# Altium PCB BATTERIE.PcbDoc
Units mm, origin at the board's own origin, x right, y up, seen from the top; angles counter-clockwise.
Board outline 68.58 x 28.65 mm, 2 copper layers (Top Layer, Bottom Layer); 31 components, 17 nets, 97 pads, 15 vias.
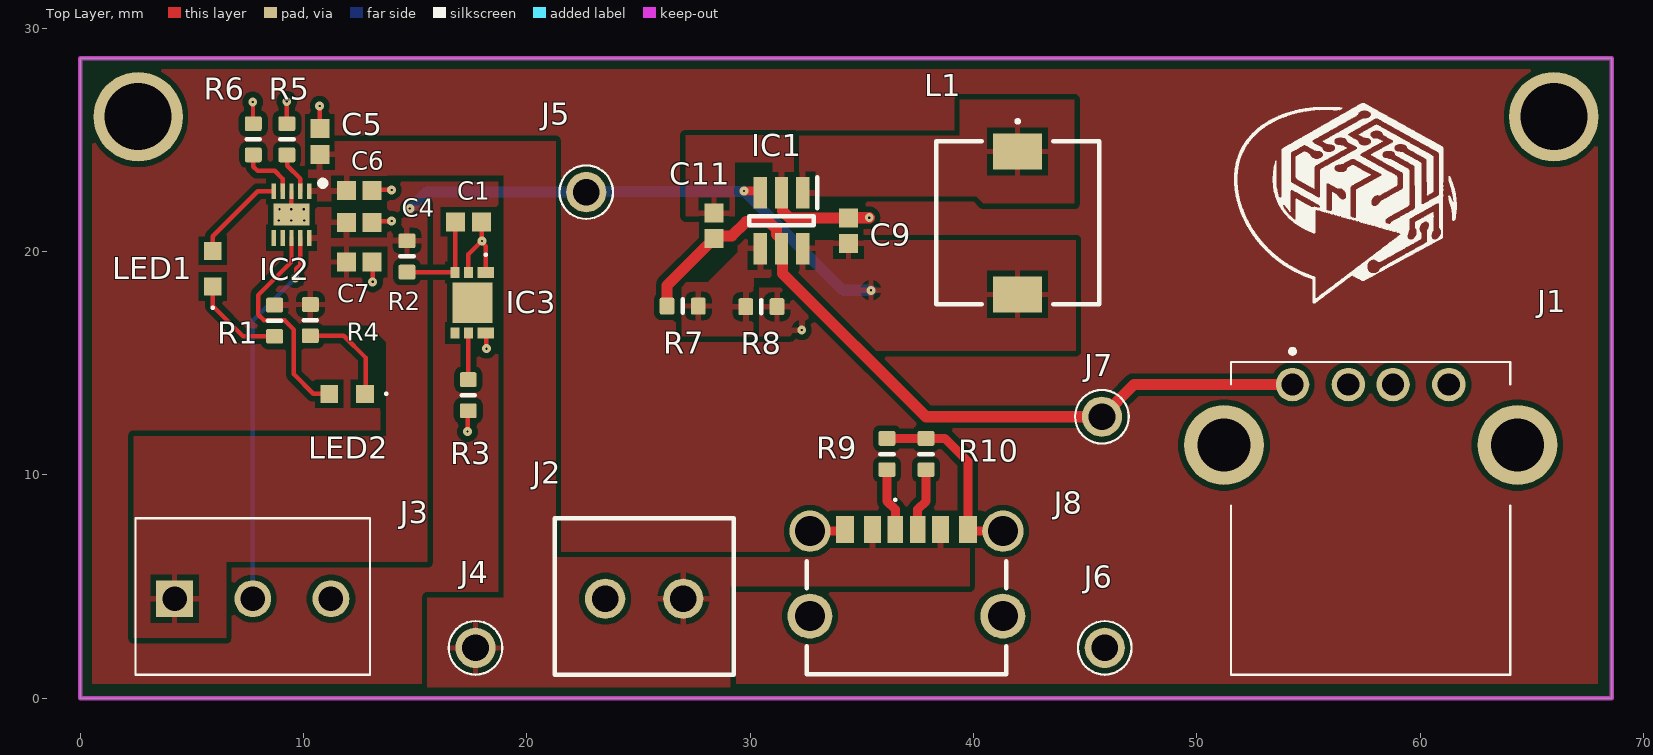
[diagram p0: Top Layer view]
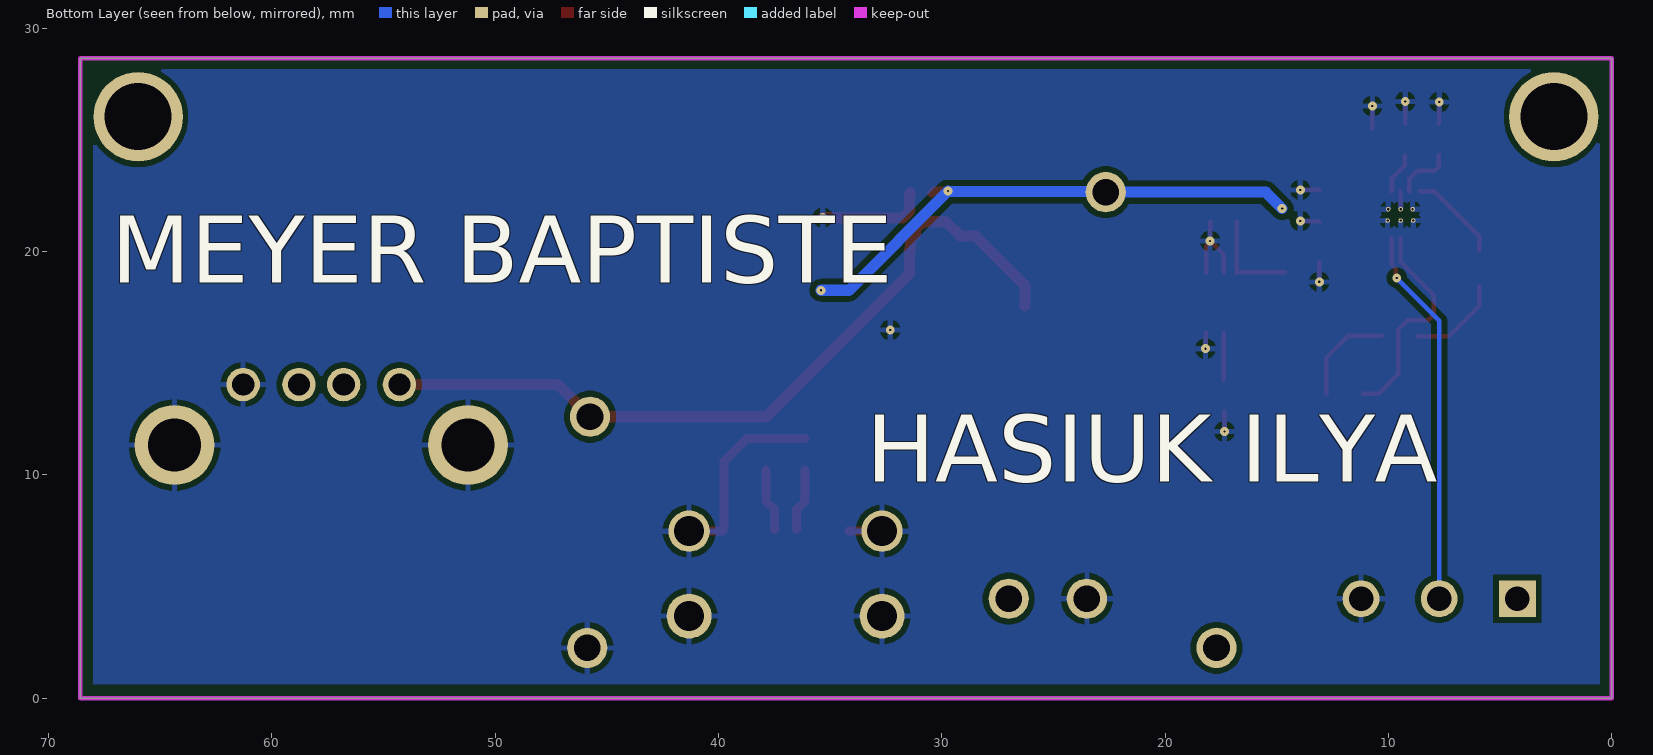
[diagram p1: Bottom Layer view, seen from below]
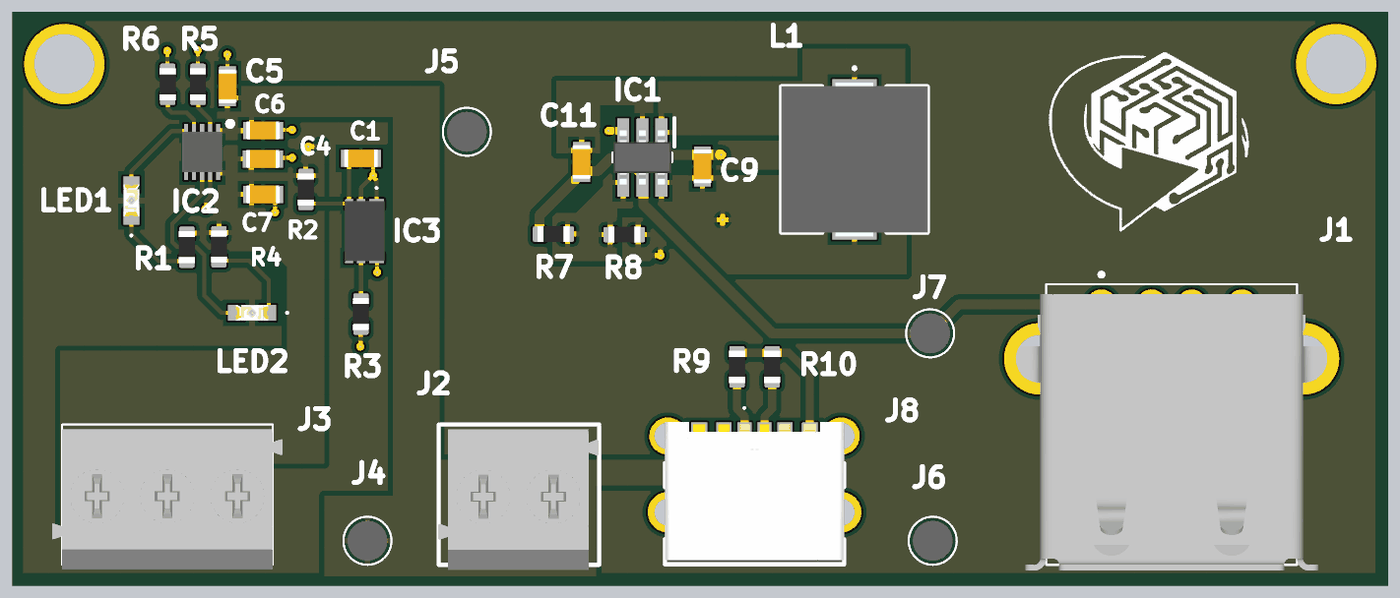
[diagram p2: 3D render of the assembled board from above, using the file's embedded part models]

## Layer stack, top to bottom
Top Solder: solder mask 0.0102, Solder Resist, Dk 3.5
Top Layer: signal copper 0.0356
Dielectric 1: dielectric 0.32, FR-4, Dk 4.8
Bottom Layer: signal copper 0.0356
Bottom Solder: solder mask 0.0102, Solder Resist, Dk 3.5

## Board outline
0,0 68.58,0 68.58,28.651 0,28.651

## Design rules (kind name [scope] priority, off if disabled: settings)
Clearance [All] p1: gap=0.254 ignorepadtopadclearanceinfootprint=TRUE except(0: Arc-Hole Track-Hole SMDPad-Hole THPad-Hole Via-Hole Fill-Hole Poly-Hole Region-Hole Text-Hole; 0.17: Arc-Arc Arc-Track Arc-SMDPad Track-Track Track-SMDPad)
PolygonConnect [All] p1: connectstyle=Relief reliefconductorwidth=0.254 reliefentries=4 polygonreliefangle="90 Angle" airgapwidth=0.254
RoutingVias [All] p1: holewidth=0.711 width=1.27 viastyle="Through Hole" minholewidth=0.711 minwidth=1.27 maxholewidth=0.711 maxwidth=1.27
SolderMaskExpansion [All] p1: expansion=0.102 istentingtop=FALSE
Width [All] p1: maxlimit=0.51 minlimit=0.2 preferedwidth=0.2
30 further rules are at their usual default settings.

## Components (designator, comment, footprint, x,y, rotation, side; value= is the part's Value field where it differs from the comment)
C1 "Capacitor 100 nF" CAPC1608X90X40LL10T20 17.383,21.33 r0 top value=100nF
C4 "Capacitor 10 uF" CAPC1608X90X40LL10T20 12.487,21.3 r0 top value=10µF
C5 "Capacitor 1 uF +/- 10% 25 V 0603" CAPC1608X90X40LL10T20 10.725,24.925 r90 top value=1µF
C6 "Capacitor 10 uF" CAPC1608X90X40LL10T20 12.497,22.722 r0 top value=10µF
C7 "Capacitor 1 uF +/- 10% 25 V 0603" CAPC1608X90X40LL10T20 12.497,19.533 r0 top value=1µF
C9 "Capacitor 10 uF" CAPC1608X90X40LL10T20 34.402,20.927 r90 top value=10µF
C11 "Capacitor 10 uF" CAPC1608X90X40LL10T20 28.377,21.152 r90 top value=10µF
IC1 "MCP1640DT-I_CHY" SOT95P270X145-6N 31.402,21.377 r270 top
IC2 "BQ24045DSQR" SON40P200X200X80-11N 9.458,21.655 r270 top
IC3 "AP9221SA-CC-HAC-7" AP9221SACCHAC7 17.558,17.705 r180 top
J1 "292303-9" 2923039 57.788,8.34 r0 top
J2 "1776275-2" 17762752 23.504,4.45 r0 top
J3 "1776275-3" 17762753 4.225,4.45 r0 top
J4 "050_LT_B2" 050LTB2 17.7,2.25 r0 top
J5 "050_LT_B2" 050LTB2 22.657,22.657 r0 top
J6 "050_LT_B2" 050LTB2 45.878,2.25 r0 top
J7 "050_LT_B2" 050LTB2 45.75,12.6 r0 top
J8 "10164359-00011LF" 1016435900011LF 36.996,4.525 r0 top
L1 "10µ" 74477710 41.977,21.277 r0 top
LED1 "150060BS75003" 150060BS75003 5.933,19.23 r90 top
LED2 "150060BS75003" 150060BS75003 11.95,13.625 r180 top
R1 "Resistor 1.5k" RESC0603(1608)_L 8.7,16.9 r90 top value=1.5k
R2 "Resistor 350R" RESC0603(1608)_L 14.629,19.78 r270 top value=350R
R3 "Resistor 2.7k" RESC0603(1608)_L 17.374,13.564 r270 top value=2.7K
R4 "Resistor 1.5k" RESC0603(1608)_L 10.3,16.925 r270 top value=1k
R5 "Resistor 120R +/-5 % 0603 0.1 W" RESC0603(1608)_L 9.25,25.025 r90 top value=1k
R6 "Resistor 2k" RESC0603(1608)_L 7.746,25.025 r90 top value=2k
R7 "Resistor 976R" RESC0603(1608)_L 26.977,17.552 r0 top value=976
R8 "Resistor 309R" RESC0603(1608)_L 30.502,17.527 r0 top value=309
R9 "Resistor 5.1k" RESC0603(1608)_L 36.125,10.929 r90 top value=5.1k
R10 "Resistor 5.1k" RESC0603(1608)_L 37.875,10.929 r90 top value=5.1k

## Footprints (in the part's own frame and the unit in brackets; to place one, negate y for a bottom-side part, rotate by r counter-clockwise, add the part's x,y. Pads: shape width x height; smd on the part's side, far side on the other; paste and mask are expansions set on the pad)
050LTB2 [mm]
  round 1.8 hole 1.2: 1(0,0)
  silkscreen extent -1.2,-1.2 1.2,1.2, body extent -1,-0.99 1,0.99, height 4.6
150060BS75003 [mm]
  rect 0.8x0.8 smd: 1(-0.8,0) 2(0.8,0)
  silkscreen extent -1.8,-0.05 -1.7,0.05, body extent -0.8,-0.4 0.8,0.4, height 0.7
2923039 [mm]
  round 1.5 hole 1: 1(-3.5,5.7) 2(-1,5.7) 3(1,5.7) 4(3.5,5.7)
  round 3.57 hole 2.38: 5(-6.57,2.99) 6(6.57,2.99)
  silkscreen extent -6.25,-7.29 6.25,7.29, body extent -8.63,-7.58 8.63,7.58, height 7.19
17762752 [mm]
  round 1.8 hole 1.2: 1(0,0) 2(3.5,0)
  silkscreen extent -2.25,-3.4 5.75,3.6, body extent -2.28,-3.65 5.72,3.35, height 8.37
17762753 [mm]
  rect 1.65x1.65 hole 1.1: 1(0,0)
  round 1.65 hole 1.1: 2(3.5,0) 3(7,0)
  silkscreen extent -1.75,-3.4 8.75,3.6, body extent -2.25,-3.63 9.25,3.37, height 8.26
74477710 [mm]
  rect 2.2x1.6 smd: 1(0,3.2) 2(0,-3.2)
  silkscreen extent -3.65,-3.65 3.65,4.6, body extent -3.65,-3.84 3.65,3.84, height 4.6
1016435900011LF [mm]
  rect 0.7x1.2 smd: A5(-0.5,3.03) B5(0.5,3.03)
  rect 0.76x1.2 smd: A9(1.52,3.03) B9(-1.52,3.03)
  rect 0.8x1.2 smd: A12(2.75,3.03) B12(-2.75,3.03)
  round 1.85 hole 1.34: MH1(-4.32,2.95) MH2(4.32,2.95)
  round 2.01 hole 1.34: MH3(-4.32,-0.85) MH4(4.32,-0.85)
  silkscreen extent -4.47,-3.45 4.47,4.4, body extent -4.47,-3.24 4.47,3.66, height 3.25
AP9221SACCHAC7 [mm]
  rect 0.75x0.5 smd: 1(-0.6,-1.35) 6(-0.6,1.35)
  rect 0.4x0.5 smd: 2(0.175,-1.35) 3(0.775,-1.35) 4(0.775,1.35) 5(0.175,1.35)
  rect 1.8x1.8 smd: 7(0,0)
  silkscreen extent -0.65,-2.2 -0.55,-2.1, body extent -1,-1.5 1,1.5, height 0.56
CAPC1608X90X40LL10T20 [mm] "Chip Capacitor, 2-Leads, Body 1.70x0.90mm, IPC High Density"
  rect 0.85x0.85 smd: 1(-0.575,0) 2(0.575,0)
  body extent -0.85,-0.45 0.85,0.45, height 0.9
RESC0603(1608)_L [mm] "Chip Resistor, Body 1.6x0.8mm, IPC High Density"
  rrect25% 0.66x0.76 smd: 1(-0.7,0) 2(0.7,0)
  silkscreen extent 0,-0.3 0,0.3, body extent -0.8,-0.4 0.8,0.4, height 0.45
SON40P200X200X80-11N [mm]
  rect 0.7x0.2 smd: 1(-1.05,0.8) 2(-1.05,0.4) 3(-1.05,0) 4(-1.05,-0.4) 5(-1.05,-0.8) 6(1.05,-0.8) 7(1.05,-0.4) 8(1.05,0) 10(1.05,0.8) pt(1.05,0.4)
  rect 1x1.6 smd: 11(0,0)
  silkscreen extent -1.52,1.28 -1.28,1.53, body extent -1,-1 1,1, height 0.8
SOT95P270X145-6N [mm]
  rect 1.4x0.6 smd: 1(-1.25,0.95) 2(-1.25,0) 3(-1.25,-0.95) 4(1.25,-0.95) 5(1.25,0) 6(1.25,0.95)
  silkscreen extent -1.95,-1.45 0.2,1.6, body extent -1.35,-1.45 1.35,1.45, height 1.45

## Part data
C1 C4 C7 C9 C11: library part CMP-001-00005-6, "Chip Capacitor, 1 uF, +/- 10%, 25 V, 0603 (1608 Metric)", Capacitor Type=Ceramic, Case/Package=0603, Max Operating Temperature=125°C, Min Operating Temperature=-55°C, Tolerance=10%, Voltage Rating=25V, Mounting Technology=SM, Pins=2, RoHS Compliant=True
C5: library part UMK107BJ105KA-T, "Chip Capacitor, 1 uF, +/- 10%, 25 V, 0603 (1608 Metric)", Capacitor Type=Ceramic, Case/Package=0603, Max Operating Temperature=125°C, Min Operating Temperature=-55°C, Tolerance=10%, Voltage Rating=25V, Mounting Technology=SM, Pins=2, RoHS Compliant=True
C6: library part CMP-001-00005-6, "Chip Capacitor, 10 uF,", Capacitor Type=Ceramic, Case/Package=0603, Max Operating Temperature=125°C, Min Operating Temperature=-55°C, Tolerance=10%, Voltage Rating=25V, Mounting Technology=SM, Pins=2, RoHS Compliant=True
IC1: "Integrated Circuit", Arrow Part Number=MCP1640DT-I/CHY, Manufacturer_Name=Microchip, Mouser Part Number=579-MCP1640DT-I/CHY, Arrow Price/Stock=https://www.arrow.com/en/products/mcp1640dt-ichy/microchip-technology?region=nac, Datasheet Link=https://componentsearchengine.com/Datasheets/2/MCP1640DT-I_CHY.pdf, Height=1.45mm, Manufacturer_Part_Number=MCP1640DT-I/CHY, Mouser Price/Stock=https://www.mouser.co.uk/ProductDetail/Microchip-Technology/MCP1640DT-I-CHY?qs=Z2DEGP6RHSmcahvjAPXzWA%3D%3D
IC2: "Integrated Circuit", Manufacturer_Name="Texas Instruments", Mouser Part Number=595-BQ24045DSQR, Arrow Part Number=BQ24045DSQR, Arrow Price/Stock=https://www.arrow.com/en/products/bq24045dsqr/texas-instruments?region=nac, Datasheet Link=http://www.ti.com/lit/gpn/bq24045, Height=0.8mm, Manufacturer_Part_Number=BQ24045DSQR, Mouser Price/Stock=https://www.mouser.co.uk/ProductDetail/Texas-Instruments/BQ24045DSQR?qs=KkE6aTVgMAQPXkV4rQ%2F6tA%3D%3D
IC3: "Integrated Circuit", Manufacturer_Name="Diodes Inc.", Mouser Part Number=621-AP9221SA-CCHAC-7, Arrow Part Number=AP9221SA-CC-HAC-7, Arrow Price/Stock=https://www.arrow.com/en/products/ap9221sa-cc-hac-7/diodes-incorporated?region=nac, Datasheet Link=https://www.diodes.com/assets/Datasheets/AP9221.pdf, Height=0.65mm, Manufacturer_Part_Number=AP9221SA-CC-HAC-7, Mouser Price/Stock=https://www.mouser.co.uk/ProductDetail/Diodes-Incorporated/AP9221SA-CC-HAC-7?qs=xZ%2FP%252Ba9zWqYP2BSSx9w0XQ%3D%3D
J1: "Connector", Manufacturer_Name="TE Connectivity", Mouser Part Number=571-292303-9, Arrow Part Number=292303-9, Arrow Price/Stock=https://www.arrow.com/en/products/292303-9/te-connectivity?region=nac, Datasheet Link=http://www.te.com/commerce/DocumentDelivery/DDEController?Action=srchrtrv&DocNm=292303&DocType=Customer+Drawing&DocLang=English&DocFormat=pdf&PartCntxt=292303-9, Height=7mm, Manufacturer_Part_Number=292303-9, Mouser Price/Stock=https://www.mouser.co.uk/ProductDetail/TE-Connectivity/292303-9?qs=WBj8811fzwEQB%252BEcKzEz4Q%3D%3D
J2: "Connector", Manufacturer_Name="TE Connectivity", Mouser Part Number=571-1776275-2, Arrow Part Number=1776275-2, Arrow Price/Stock=https://www.arrow.com/en/products/1776275-2/te-connectivity?region=nac, Datasheet Link=https://www.mouser.co.uk/ProductDetail/TE-Connectivity-AMP/1776275-2/?qs=%2Fha2pyFaduh5oRLpYFqVQ2CuT224sRAAEtPMkKhfNDU%3D, Height=8.6mm, Manufacturer_Part_Number=1776275-2, Mouser Price/Stock=https://www.mouser.co.uk/ProductDetail/TE-Connectivity/1776275-2?qs=vnwGVgFuQiZz9SD%252Bziemgw%3D%3D
J3: "Connector", Manufacturer_Name="TE Connectivity", Mouser Part Number=571-1776275-3, Arrow Part Number=1776275-3, Arrow Price/Stock=https://www.arrow.com/en/products/1776275-3/te-connectivity?region=nac, Datasheet Link=https://www.te.com/commerce/DocumentDelivery/DDEController?Action=srchrtrv&DocNm=1-1773458-1_EURO_STYLE_QRG&DocType=Data+Sheet&DocLang=English&PartCntxt=1776275-3&DocFormat=pdf, Height=8.3mm, Manufacturer_Part_Number=1776275-3, Mouser Price/Stock=https://www.mouser.co.uk/ProductDetail/TE-Connectivity/1776275-3?qs=vnwGVgFuQiaG2mifqnUIBA%3D%3D
J4 J5 J6 J7: "Connector", Manufacturer_Name=Oxley, Manufacturer_Part_Number=050/LT/B2, Datasheet Link=http://www.farnell.com/datasheets/2644146.pdf?_ga=2.63921641.795442872.1562935128-2061028581.1560430415, Height=4.5mm
J8: "Connector", Manufacturer_Name=Amphenol, Mouser Part Number=649-10164359-00011LF, Arrow Part Number=10164359-00011LF, Arrow Price/Stock=https://www.arrow.com/en/products/10164359-00011lf/amphenol-fci?region=nac, Datasheet Link=https://cdn.amphenol-cs.com/media/wysiwyg/files/drawing/10164359.pdf, Height=3.41mm, Manufacturer_Part_Number=10164359-00011LF, Mouser Price/Stock=https://www.mouser.co.uk/ProductDetail/Amphenol-FCI/10164359-00011LF?qs=MyNHzdoqoQLpQ%2FmSqA1%252BtQ%3D%3D
L1: library part 74477710, "Inductor", Manufacturer_Name="Wurth Elektronik", Mouser Part Number=710-74477710, Datasheet Link=https://www.we-online.com/catalog/datasheet/74477710.pdf, Height=4.5mm, Manufacturer_Part_Number=74477710, Mouser Price/Stock=https://www.mouser.co.uk/ProductDetail/Wurth-Elektronik/74477710?qs=E%2F%2FhvbtCqpNuU6Mc9NsODA%3D%3D
LED1 LED2: "LED", Manufacturer_Name="Wurth Elektronik", Mouser Part Number=710-150060BS75003, Datasheet Link=https://www.we-online.com/components/products/datasheet/150060BS75003.pdf, Height=0.8mm, Manufacturer_Part_Number=150060BS75003, Mouser Price/Stock=https://www.mouser.co.uk/ProductDetail/Wurth-Elektronik/150060BS75003?qs=Li%252BoUPsLEnu8LvIbM48DKA%3D%3D
R1 R2 R3 R4 R5 R6 R7 R8 R9 R10: library part CMP-009-00176-3, "Chip Resistor, 120 Ohms, +/-5 %, 0.1 W, -55 to 155 degC, 0603", Case/Package=0603, Max Operating Temperature=155°C, Min Operating Temperature=-55°C, Power=100mW, Tolerance=5%, Pins=2

## Free pads (board coordinates)
  round 0.2 hole 0.1: 3(8.89,21.387) 3(8.915,21.895) 3(9.449,21.387) 3(9.449,21.895) 3(10.008,21.895) 3(10.033,21.387)
  round 4 hole 3: 4(2.591,26.035) 4(65.989,26.035)

## Via types
v1: diameter 0.4, hole 0.1, Top Layer to Bottom Layer, 14 vias
v2: diameter 0.4/0.4 (per signal layer), hole 0.1, Top Layer to Bottom Layer, 1 vias

## Nets (pads, with @x,y where several pads share a name; then routed paths per layer and width w, separated by ;. In a path a pad name is that pad's centre, name@x,y a point inside that pad or via, vN(x,y) a via of type N, cw(c..) or ccw(c..) an arc to the next point about the centre after c; other vN are vias at no path point)
+5V: C5.1 C6.1 IC2.1 J2.2 J4.1 J8.A9 J8.B9
CC1: J8.A5 R9.1 | length 2.8
  Top Layer w0.4: R9.1@36.125,10.225 36.125,8.825 36.501,8.449 J8.A5@36.501,7.555
CC2: J8.B5 R10.1 | length 2.8
  Top Layer w0.4: J8.B5@37.499,7.555 37.499,8.449 37.875,8.825 R10.1@37.875,10.225
"GND USB-C": C1.2 C4.2 C5.2 C6.2 C7.2 C9.2 C11.2 IC1.2 IC2.3 IC2.11 IC3.1 IC3.2 IC3.6 J1.4 J1.5 J1.6 J2.1 J3.3 J6.1 J8.A12 J8.B12 J8.MH1 J8.MH2 J8.MH3 J8.MH4 pad.3 R3.2 R5.2 R6.2 R8.2 R9.2 R10.2 | length 27.3
  Top Layer w0.2: v1(7.722,26.695) 7.734,26.683 7.734,25.737 R6.2 ; v1(9.246,26.721) 9.248,26.719 9.248,25.727 R5.2 ; IC2.11@9.449,21.895 9.449,22.25 9.458,22.26 IC2.3 ; v1(10.719,26.518) 10.719,25.506 C5.2 ; C4.2 13.124,21.361 v1(13.945,21.361) ; C7.2 13.094,19.51 v2(13.094,18.64) ; C6.2 13.108,22.758 v1(13.945,22.758) ; v1@17.358,11.952 R3.2@17.358,12.847 ; IC3.2 17.383,19.872 v1(17.983,20.472) ; C1.2 17.983,21.305 v1(17.983,20.472) ; IC3.6 18.186,16.327 v1(18.186,15.646) ; IC3.1 18.158,20.243 17.983,20.418 v1(17.983,20.472) ; J8.B12@34.166,7.475 J8.B12
  Top Layer w0.4: J8.MH1 J8.B12@34.166,7.475 ; R9.2 R10.2 38.714,11.629 39.746,10.597 J8.A12 39.826,7.475 J8.MH2
  Top Layer w0.5: IC1.2 31.452,22.577 31.452,21.82 31.765,21.507 C9.2@34.402,21.507 ; C9.2 34.414,21.514 v1(35.331,21.514)
  other v1: 17.341,11.936 32.309,16.485
NetC1_1: C1.1 IC3.3 R2.2 | length 4.4
  Top Layer w0.2: R2.2 14.641,19.068 16.771,19.068 IC3.3 C1.1@16.783,21.33
NetC11_1: C11.1 IC1.5 J1.1 J7.1 R7.1 | length 35.3
  Top Layer w0.5: R7.1 26.277,18.477 C11.1 28.495,20.695 29.17,20.695 29.806,21.331 30.842,21.331 31.172,21.001 31.172,20.757 31.402,20.527 IC1.5 31.452,20.077 31.452,19.023 37.875,12.6 J7.1 47.19,14.04 J1.1
NetIC1_1: IC1.1 L1.1
NetIC1_4: IC1.4 R7.2 R8.1
NetIC2_2: IC2.2 R5.1 | length 1.8
  Top Layer w0.2: R5.1@9.271,24.3 9.271,23.843 9.858,23.256 IC2.2
NetIC2_4: IC2.4 R6.1 | length 2.6
  Top Layer w0.2: R6.1@7.75,24.325 7.75,23.8 7.939,23.611 8.702,23.611 9.058,23.256 IC2.4
NetIC2_5: IC2.5 LED1.2 | length 4.2
  Top Layer w0.2: LED1.2 5.933,20.679 7.949,22.695 IC2.5@8.604,22.695
NetIC2_8: IC2.8 LED2.2 | length 9.9
  Top Layer w0.2: IC2.8 9.458,19.54 7.966,18.048 7.966,17.172 8.222,16.916 9.147,16.916 9.566,16.496 9.566,14.497 10.438,13.625 LED2.2
NetIC3_5: IC3.5 R3.1 | length 2.1
  Top Layer w0.2: R3.1@17.383,14.264 IC3.5
NetLED1_1: LED1.1 R1.1 | length 4.2
  Top Layer w0.2: LED1.1 5.933,17.555 7.288,16.2 R1.1
NetLED2_1: LED2.1 R4.2 | length 4.5
  Top Layer w0.2: R4.2 11.8,16.225 12.775,15.25 12.775,13.65 LED2.1
NTC: IC2.pt J3.2 | length 17
  Top Layer w0.2: v1(9.625,18.818) 9.663,18.856 9.663,19.222 9.858,19.417 IC2.pt
  Bottom Layer w0.2: J3.2 7.725,16.9 9.625,18.8 v1(9.625,18.818)
OUT_BMS: C4.1 C7.1 C9.1 IC1.3 IC1.6 IC2.10 J3.1 J5.1 L1.2 R1.2 R2.1 R4.1 | length 23.6
  Top Layer w0.4: v1(29.718,22.708) 30.371,22.708 IC1.3
  Bottom Layer w0.5: v1(14.757,21.92) 15.494,22.657 J5.1 22.682,22.682 29.693,22.682 v1(29.718,22.708) 34.163,18.263 v1(35.408,18.263)
pads on no net: IC2.6 IC2.7 IC3.4 IC3.7 J1.2 J1.3

## Polygon pours and split planes (outlines as drawn)
no net on Top Layer "NONET_L01_P012" (solid, pour order 12): 0.533,28.169 67.97,28.169 67.945,28.143 67.945,0.635 0.533,0.635
NetIC1_1 on Top Layer "NETIC1_1_L01_P003" (solid, pour order 3): 44.515,22.152 44.515,26.802 39.39,26.802 39.39,25.177 32.164,25.177 32.165,22.477 33.265,22.477 40.115,22.477 40.44,22.152
+5V on Top Layer "+5V_L01_P009" (solid, pour order 9): 39.827,8.637 39.827,5.004 29.108,5.004 29.108,0.483 19.355,0.483 15.545,0.483 15.545,4.496 18.974,4.496 18.974,23.393 12.446,23.393 12.446,22.25 10.211,22.25 10.211,24.943 21.285,24.943 21.285,6.299 32.741,6.299 35.078,8.637
OUT_BMS on Top Layer "OUT_BMS_L01_P011" (solid, pour order 11): 8.7,16.688 8.7,18.466 10.008,18.466 10.008,22.149 15.545,22.149 15.545,6.096 6.528,6.096 6.528,2.692 2.388,2.692 2.388,11.735 13.691,11.735 13.691,15.926 12.929,16.688
"GND USB-C" on Top Layer "GND_USB-C_L01_P002" (solid, pour order 2): 29.302,21.577 27.114,21.577 27.114,25.197 31.939,25.197 31.939,21.739 31.014,21.739 31.014,23.989 29.302,23.989
OUT_BMS on Top Layer "OUT_BMS_L01_P004" (solid, pour order 4): 44.577,15.552 44.577,20.502 35.227,20.502 32.102,20.502 32.102,18.827 35.034,15.552
"GND USB-C" on Top Layer "GND_USB-C_L01_P005" (solid, pour order 5): 30.402,16.202 30.402,18.377 32.602,18.377 32.602,16.202
NetIC1_4 on Top Layer "NETIC1_4_L01_P006" (solid, pour order 6): 30.152,18.827 30.152,18.352 30.152,18.302 30.156,16.202 26.927,16.202 26.927,18.614 28.102,18.614 29.452,19.964 29.452,20.589 29.927,21.064 31.027,21.064 31.027,19.464 31.027,18.827
"GND USB-C" on Bottom Layer "GND_USB-C_L02_P008" (solid, pour order 8): 0.533,0.61 67.996,0.61 67.996,28.169 0.533,28.169

## Keep-outs
Keep-Out Layer:
  the board outline again, w0.2

## Silkscreen, mask and mechanical layers (free items; w line width, h text height)
Top Overlay:
  drawing of 2 lines, arcs and shapes, not listed
Bottom Overlay:
  text "MEYER BAPTISTE" at 67.191,18.61 h3
  text "HASIUK ILYA" at 33.384,9.695 h3